# EAGLE board WBD_02_OBD2X (EAGLE 9.6.2)
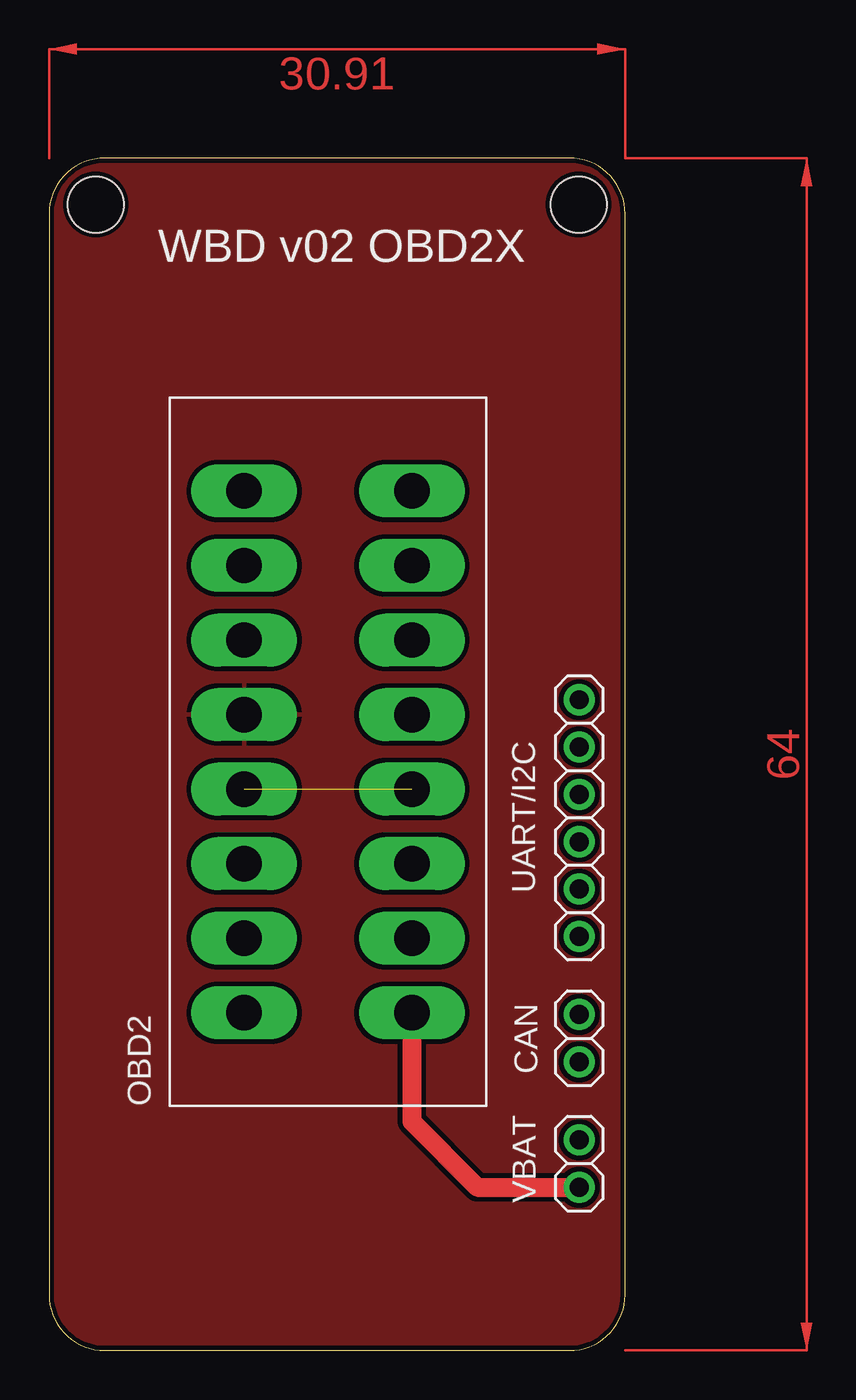
[diagram p0: board, top side]
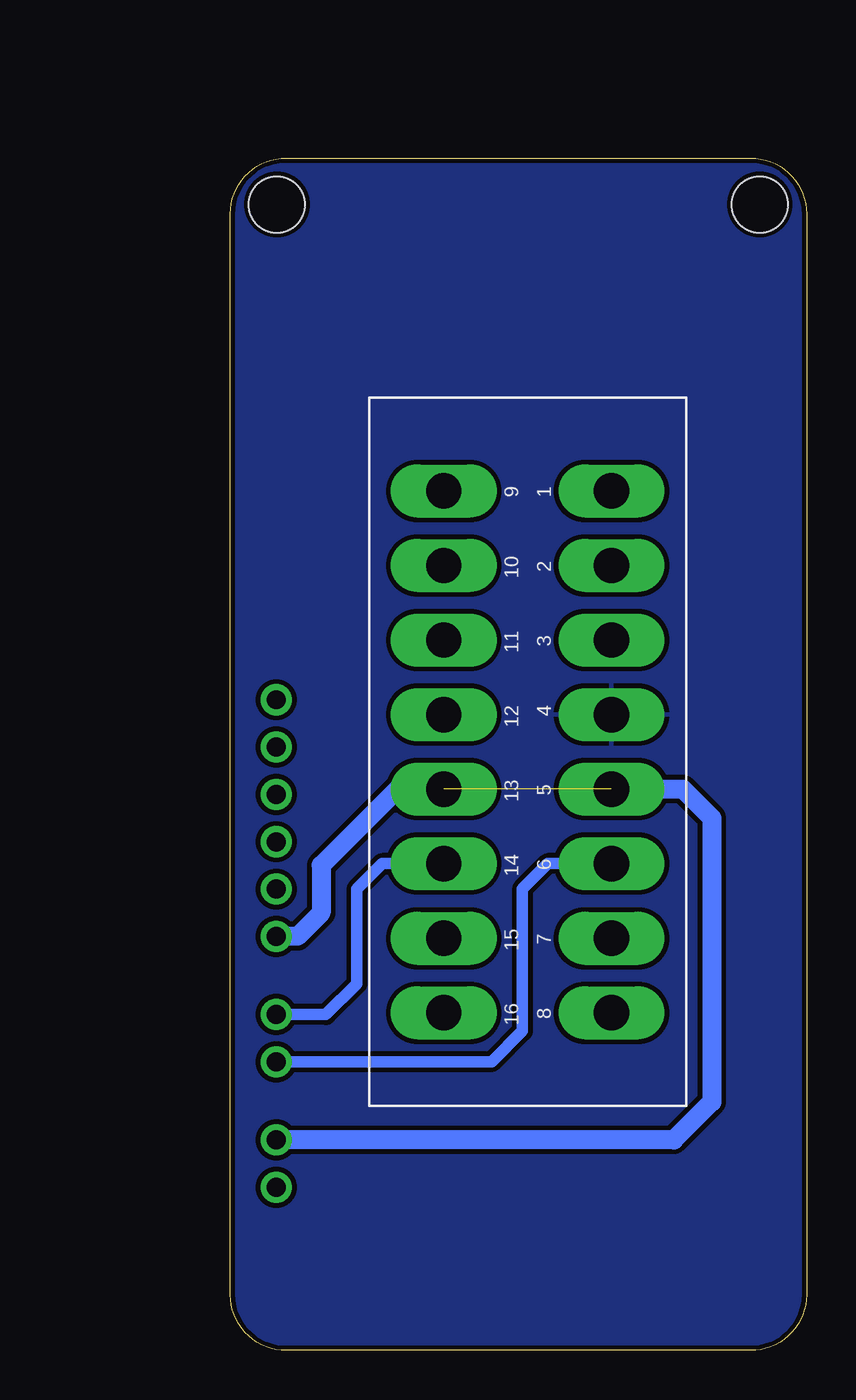
[diagram p1: board, bottom side, seen from below]

Size 30.91 x 64 mm. Coordinates in mm from the lower left corner, seen from the top.
Outline: 30.91,3 30.91,61 arc90 27.91,64 3,64 arc90 0,61 0,3 arc90 3,0 27.91,0 arc90 30.91,3
Copper layers (1*16): Top 0.035559375mm / dielectric 1.6mm / Bottom 0.035559375mm
Design rules "jlcpcb2layer": minimum track width 5mil, minimum drill 12mil, track to track 5mil, track to pad 5mil, pad to pad 5mil, via to via 5mil, smd to smd 5mil, copper to edge 8mil, drill to drill 6mil, minimum pad ring 5mil, minimum via ring 3mil, stop-mask expansion 2.5mil, vias tented up to drill 0mil, thermal gap 10mil
Holes 3 mm at 2.51,61.5 28.42,61.5

## Footprints (pad centres in the part's own frame; a part is rotated, then mirrored left to right if it is on the bottom)
1X02 = drill 1.016 pad 1.676: 1 -1.27,0; 2 1.27,0
OBD2 = drill 1.9 pad 2.184 long: 1 30,19; 2 26,19; 3 22,19; 4 18,19; 5 14,19; 6 10,19; 7 6,19; 9 30,10; 10 26,10; 11 22,10; 12 18,10; 13 14,10; 14 10,10; 15 6,10; 16 2,10 | drill 1.9 pad 1.778 long: 8 2,19
1X06 = drill 1.016 pad 1.676: 1 -6.35,0; 2 -3.81,0; 3 -1.27,0; 4 1.27,0; 5 3.81,0; 6 6.35,0

## Placement (x,y rotation side)
CAN  [1X02]  28.45,16.76 90 top
OBD2  OBD2  [OBD2]  29.46,16.13 90 top
UART/I2C  [1X06]  28.45,28.57 270 top
VBAT  [1X02]  28.45,10.03 90 top

## Library data of the parts
CAN UART/I2C VBAT = pinhead
OBD2 = OBD2

## Nets
+3V3: UART/I2C.1
CANH: CAN.1 OBD2.6
CANL: CAN.2 OBD2.14
CHASIS: OBD2.4
GND: OBD2.5 OBD2.13 UART/I2C.6 VBAT.2
RX: UART/I2C.4
SCL2: UART/I2C.3
SDA2: UART/I2C.2
TX: UART/I2C.5
VEXT: OBD2.16 VBAT.1

## Tracks (layer width: path | path; a pad name or v marks a point on that pad's centre or on a via)
CANH
  Bottom 0.61: OBD2.6 13.88,26.13 15.24,24.77 15.24,17.14 16.89,15.49 CAN.1
CANL
  Bottom 0.61: OBD2.14 22.77,26.13 24.13,24.77 24.13,19.68 25.78,18.03 CAN.2
CHASIS
  pour Bottom (isolate 0.254): 0,64.39 30.99,64.39 30.99,0 0,0
  pour Top (isolate 0.254): 0,64.39 30.99,64.39 30.99,0 0,0
GND  (1 unrouted)
  Bottom 1.016: OBD2.13 21.94,30.13 26.04,26.04 26.04,23.5 27.3,22.23 UART/I2C.6 | OBD2.5 6.63,30.13 5.08,28.57 5.08,13.34 7.11,11.3 VBAT.2
VEXT
  Top 1.016: OBD2.16 19.46,12.29 22.99,8.76 VBAT.1
(copper drawn outside any net)
  shapes: Top area x2

## Text on the board
tNames: WBD v02 OBD2X